# EAGLE board D8035E_pcb_a.v1 (EAGLE 5.07)
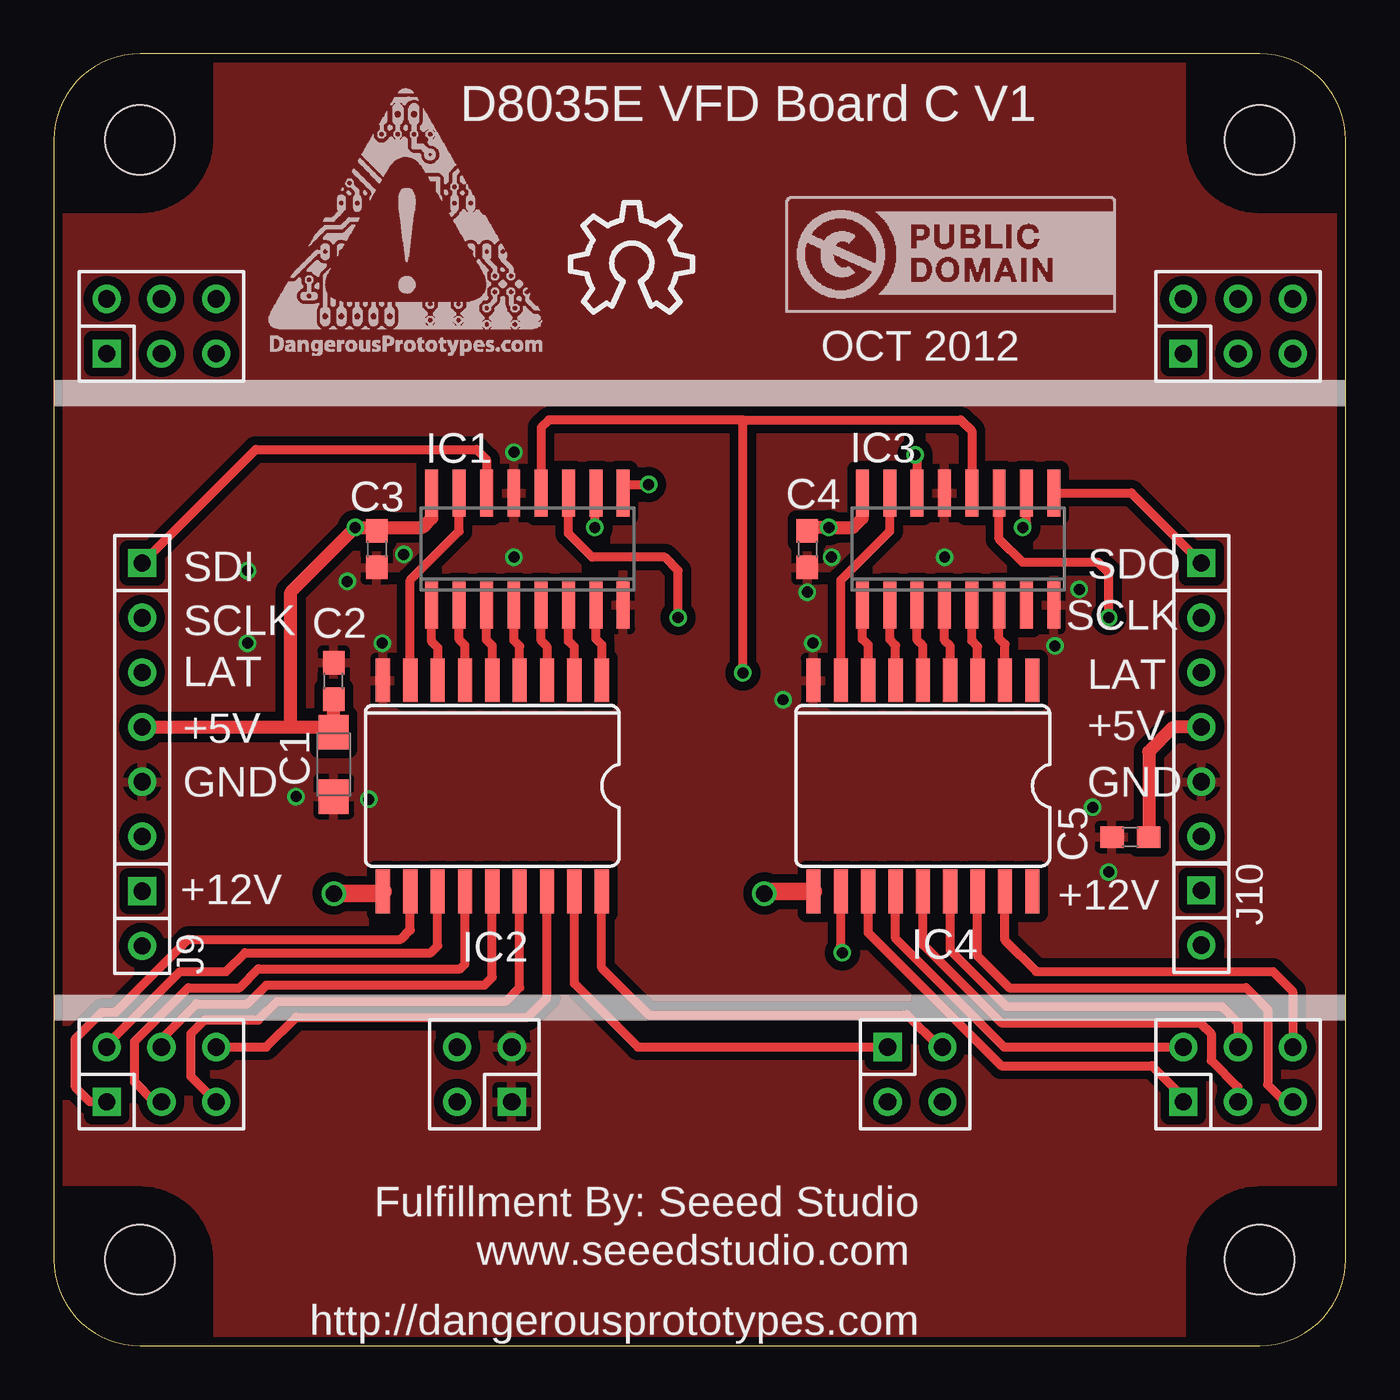
[diagram p0: board, top side]
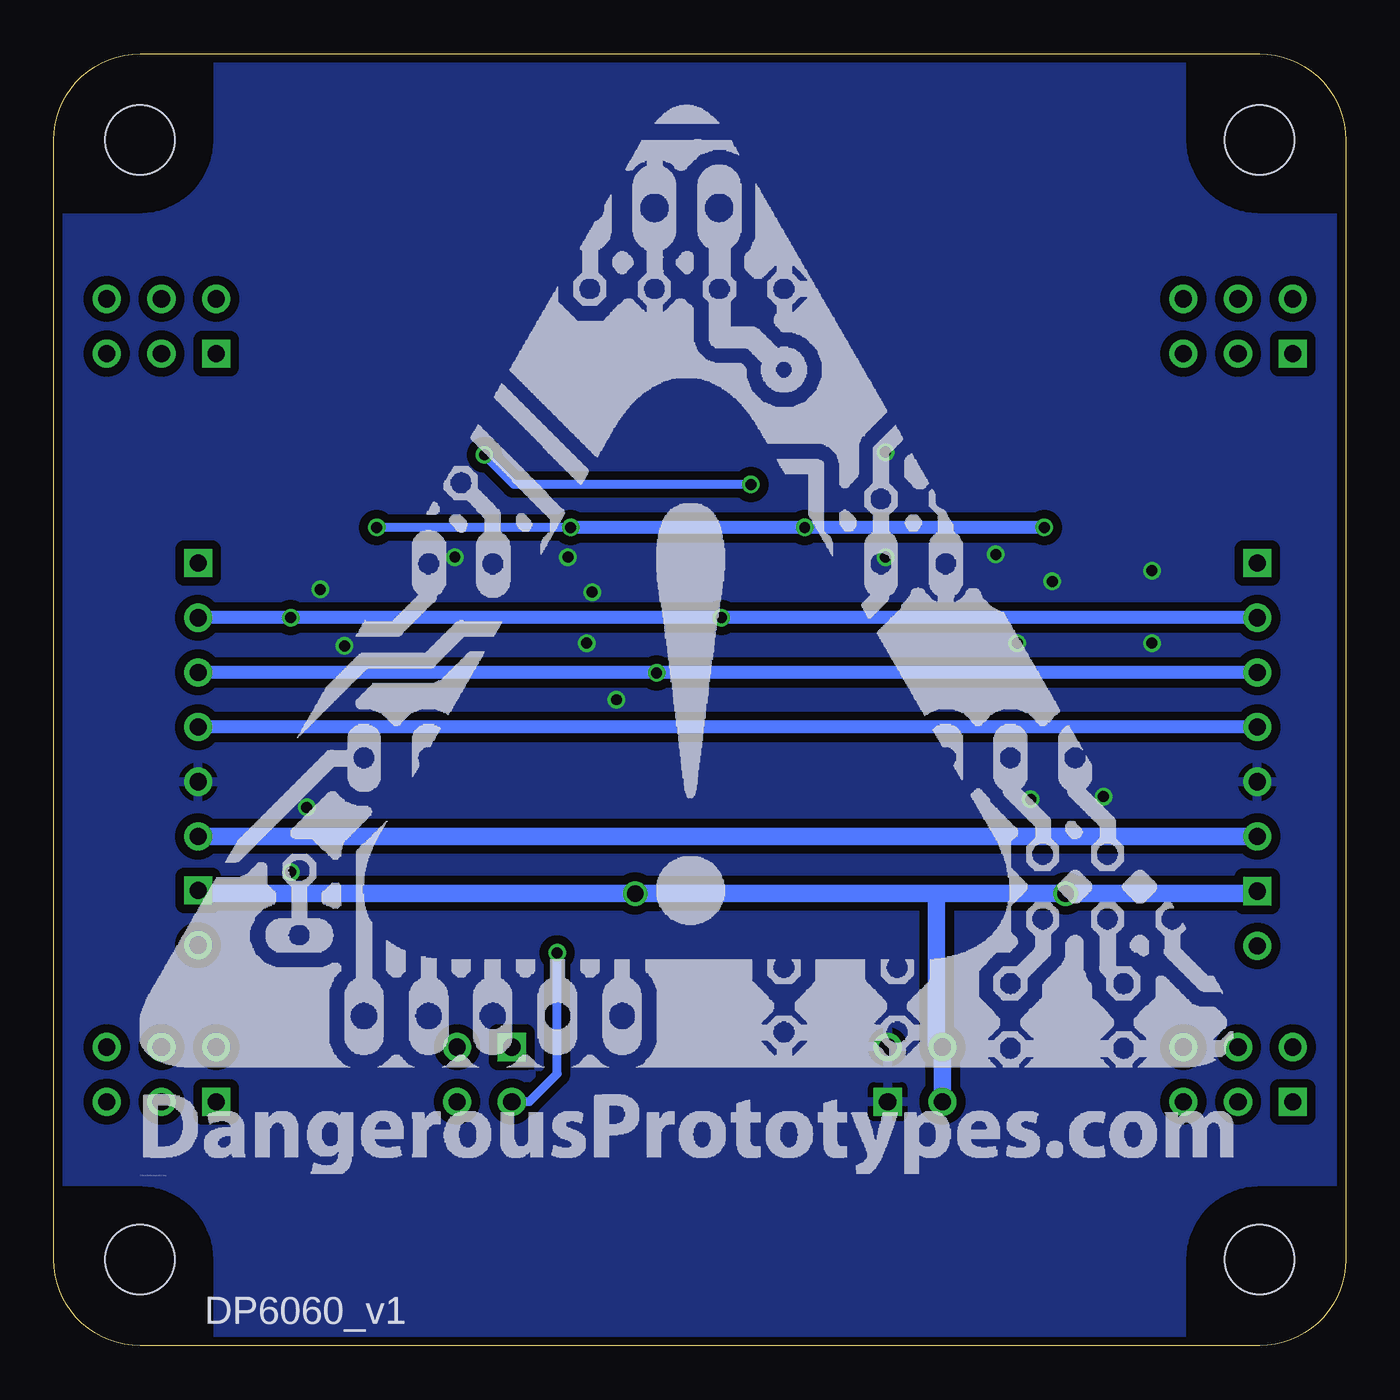
[diagram p1: board, bottom side, seen from below]

Size 60 x 60 mm. Coordinates in mm from the lower left corner, seen from the top.
Copper layers (1*16): Top 0.035mm / dielectric 1.5mm / Bottom 0.035mm
Design rules "Fusion_eagle_rule_v1.1": minimum track width 6mil, minimum drill 12mil, track to track 6mil, track to pad 6mil, pad to pad 6mil, via to via 6mil, smd to smd 0mil, copper to edge 10mil, drill to drill 10mil, minimum pad ring 10mil, minimum via ring 6mil, stop-mask expansion 2mil, vias tented up to drill 100mil, thermal gap 10mil

## Footprints (pad centres in the part's own frame; a part is rotated, then mirrored left to right if it is on the bottom)
SMC_A = smd 1.6 x 1.4: + -1.5,0; - 1.5,0
C603 = smd 1.1 x 1: 1 -0.85,0; 2 0.85,0
SOIC-16 = smd 0.6 x 2.2: 1 -4.445,-2.6; 2 -3.175,-2.6; 3 -1.905,-2.6; 4 -0.635,-2.6; 5 0.635,-2.6; 6 1.905,-2.6; 7 3.175,-2.6; 8 4.445,-2.6; 9 4.445,2.6; 10 3.175,2.6; 11 1.905,2.6; 12 0.635,2.6; 13 -0.635,2.6; 14 -1.905,2.6; 15 -3.175,2.6; 16 -4.445,2.6
SO-18L = smd 0.66 x 2.032: 1 -4.445,-4.902; 2 -3.175,-4.902; 3 -1.905,-4.902; 4 -0.635,-4.902; 5 0.635,-4.902; 6 1.905,-4.902; 7 3.175,-4.902; 8 4.445,-4.902; 9 5.715,-4.902; 10 5.715,4.902; 11 4.445,4.902; 12 3.175,4.902; 13 1.905,4.902; 14 0.635,4.902; 15 -0.635,4.902; 16 -1.905,4.902; 17 -3.175,4.902; 18 -4.445,4.902
M2X3 = drill 0.8 square: 1 -2.54,-1.27 | drill 0.8 round: 2 -2.54,1.27; 3 0,-1.27; 4 0,1.27; 5 2.54,-1.27; 6 2.54,1.27
M2X2 = drill 0.8 square: 1 -1.27,-1.27 | drill 0.8 round: 2 -1.27,1.27; 3 1.27,-1.27; 4 1.27,1.27
M1X6 = drill 0.8 square: 1 0,0 | drill 0.8 round: 2 2.54,0; 3 5.08,0; 4 7.62,0; 5 10.16,0; 6 12.7,0
M1X2 = drill 0.8 square: 1 -1.27,0 | drill 0.8 round: 2 1.27,0
DP6060_V1 = hole 3.2: 4,4; 56,4; 56,56; 4,56

## Placement (x,y rotation side)
C1  10uF 10v  [SMC_A]  13,27 270 top
C2  0.1uF  [C603]  13,30.88 90 top
C3  0.1uF  [C603]  15,37 270 top
C4  0.1uF  [C603]  35,37 270 top
C5  0.1uF  [C603]  50,23.62 180 top
IC1  IC_74HC595-SOIC-16  [SOIC-16]  22,37 0 top
IC2  IC_TD62783-SO-18W  [SO-18L]  21,26 180 top
IC3  IC_74HC595-SOIC-16  [SOIC-16]  42,37 0 top
IC4  IC_TD62783-SO-18W  [SO-18L]  41,26 180 top
J1  CON_HEADER_2X03-PTH  [M2X3]  5,12.6 0 top
J2  CON_HEADER_2X03-PTH  [M2X3]  55,12.6 0 top
J3  CON_HEADER_2X02-PTH  [M2X2]  20,12.6 90 top
J4  CON_HEADER_2X02-PTH  [M2X2]  40,12.6 270 top
J5  CON_HEADER_2X03-PTH  [M2X3]  55,47.35 0 top
J6  CON_HEADER_2X03-PTH  [M2X3]  5,47.35 0 top
J7  CON_HEADER_1X06-PTH  [M1X6]  4.1,36.35 270 top
J8  CON_HEADER_1X06-PTH  [M1X6]  53.3,36.35 270 top
J9  CON_HEADER_1X02-PTH  [M1X2]  4.1,19.84 270 top
J10  CON_HEADER_1X02-PTH  [M1X2]  53.3,19.87 270 top
PCB1  PCB_DP_SQUARE-6X6  [DP6060_V1]  0,0 0 top
U$1  FRAME_DINA4_L  [DP_LOGO]  0.87,-7.06 0 top  (outside the outline)
U$2  [DP_LOGO_ART_2X2]  56,8 0 bottom
U$3  [LOGO_CC-0]  34,48 0 top
U$4  [OSHW_10X200_NOTEXT]  24,48 0 top
U$5  [DP_LOGO_ART_0.5X0.5]  10,46 0 top

## Library data of the parts
C1-C5 IC1-IC4 J1-J10 PCB1 U$2 U$3 U$5 = dp_devices
U$1 = dp_devices; FF1: fulfillment by; FF2: Seeed Studio; FF3: www.seeedstudio.com; LICENSE: CC-0; PROJECT: D8035E VFD Board A V1; URL1: http://DangerousPrototypes.com
U$4 = ohw-logo

## Nets
+5V: C1.+ C2.1 C3.1 C4.1 C5.1 IC1.10 IC1.16 IC3.10 IC3.16 J7.4 J8.4
+12V: IC2.10 IC4.10 J3.2 J3.4 J9.1 J10.1
+180V_PASS: J7.6 J8.6
-: IC1.7 IC2.1
A: IC1.15 IC2.8
B: IC1.1 IC2.7
C: IC1.2 IC2.6
D: IC1.3 IC2.5
DP: IC3.15 IC4.8
E: IC1.4 IC2.4
F: IC1.5 IC2.3
G: IC1.6 IC2.2
G1: IC3.1 IC4.7
G2: IC3.2 IC4.6
G3: IC3.3 IC4.5
G4: IC3.4 IC4.4
G5: IC3.5 IC4.3
G6: IC3.6 IC4.2
GND: C1.- C2.2 C3.2 C4.2 C5.2 IC1.8 IC1.13 IC2.9 IC3.8 IC3.13 IC4.9 J3.1 J3.3 J7.5 J8.5
LATCH: IC1.12 IC3.12 J7.3 J8.3
N$1: IC1.9 IC3.14
N$2: IC3.9 J8.1
OUT_-: IC2.18 J4.2
OUT_A: IC2.11 J1.1
OUT_B: IC2.12 J1.2
OUT_C: IC2.13 J1.3
OUT_D: IC2.14 J1.4
OUT_DP: IC4.11 J4.3
OUT_E: IC2.15 J1.5
OUT_F: IC2.16 J1.6
OUT_G: IC2.17 J4.1
OUT_G1: IC4.12 J2.1
OUT_G2: IC4.13 J2.2
OUT_G3: IC4.14 J2.3
OUT_G4: IC4.15 J2.4
OUT_G5: IC4.16 J2.5
OUT_G6: IC4.17 J2.6
SCLK: IC1.11 IC3.11 J7.2 J8.2
SDA: IC1.14 J7.1

## Tracks (layer width: path | path; a pad name or v marks a point on that pad's centre or on a via)
+5V  (via drill 0.51)
  Top 0.406: 25.12,38.62 25.18,38.67 IC1.10 25.12,39.55 v25.12,38 | IC3.10 45.17,38.17 v45,38
  Top 0.61: C4.1 35,38 v36,38 37.12,38 37.55,38.43 IC3.16 | IC1.16 17.55,38.43 17.12,38 15.15,38 C3.1 14.85,38 v14,38 11,35 11,28.73 | J7.4 11,28.73 | 11,28.73 12.77,28.73 | 12.77,28.73 C1.+ | 12.77,28.73 12.98,28.73 13,28.75 C2.1 | C5.1 50.85,27.58 52,28.73 J8.4
  Bottom 0.406: v36,38 v45,38
  Bottom 0.61: v14,38 v25.12,38 v36,38 | J7.4 J8.4
+12V  (via drill 0.76)
  Top 0.813: IC4.10 33,21.1 v33,21 | v13,21 15.19,21 IC2.10
  Bottom 0.813: J3.2 J3.4 18.87,13.87 19,14 19,21 | J9.1 4,21.11 4,21 v13,21 19,21 | J10.1 53.14,21.14 53,21 v33,21 32,21 19,21
+180V_PASS
  Bottom 0.813: J7.6 J8.6
-
  Top 0.406: IC2.1 25.45,32.55 25.18,32.83 IC1.7
A
  Top 0.406: IC2.8 16.55,35.55 18.82,37.83 IC1.15
B
  Top 0.406: IC2.7 17.82,32.42 17.55,32.7 IC1.1
C
  Top 0.406: IC2.6 19.09,32.53 18.82,32.8 IC1.2
D
  Top 0.406: IC2.5 20.36,32.51 20.09,32.78 IC1.3
DP
  Top 0.406: IC4.8 36.55,35.55 38.83,37.83 IC3.15
E
  Top 0.406: IC2.4 21.64,32.49 21.36,32.76 IC1.4
F
  Top 0.406: IC2.3 22.91,32.47 22.64,32.74 IC1.5
G
  Top 0.406: IC2.2 24.18,32.45 23.91,32.72 IC1.6
G1
  Top 0.406: IC3.1 37.55,32.82 37.83,32.55 IC4.7
G2
  Top 0.406: IC3.2 38.83,32.8 39.09,32.53 IC4.6
G3
  Top 0.406: IC4.5 40.37,32.51 40.09,32.78 IC3.3
G4
  Top 0.406: IC4.4 41.63,32.49 41.37,32.76 IC3.4
G5
  Top 0.406: IC4.3 42.91,32.47 42.63,32.74 IC3.5
G6
  Top 0.406: IC4.2 44.17,32.58 43.91,32.84 IC3.6
GND  (via drill 0.51)
  other vias: 41.38,36.62 21.38,36.62 21.38,41.5 46.5,32.5 13.62,35.5 9,36 9,32.62 15.25,32.62 11.25,25.5 14.62,25.38 49,22 35.25,32.62 33.88,30 47.62,35.12 35,35 36.12,36.62 16.25,36.75 48.25,25
  pour Top (isolate 0.406, rank 6): 0,60 60,60 60,0 0,0
  pour Bottom (isolate 0.406, rank 6): 0,60 60,60 60,0 0,0
LATCH  (via drill 0.51)
  Top 0.406: IC1.12 22.64,42.63 23,43 32,43 | 32,43 42.12,43 42.63,42.49 IC3.12 | v32,31.25 32,43
  Bottom 0.406: J8.3 32.1,31.27 v32,31.25
  Bottom 0.61: J7.3 J8.3
N$1  (via drill 0.51)
  Top 0.406: IC1.9 26.45,39.95 26.5,40 v27.62,40 | IC3.14 40.09,41.28 v40,41.38
  Bottom 0.406: v27.62,40 38.62,40 v40,41.38
N$2
  Top 0.406: IC3.9 50.05,39.6 J8.1
OUT_-
  Top 0.406: J4.2 41.13,13.87 39.62,15.38 27.62,15.38 25.45,17.55 IC2.18
OUT_A
  Top 0.406: IC2.11 16.55,19.3 16.12,18.88 6.25,18.88 2.88,15.5 2.25,15.5 1,14.25 1,12 1.67,11.33 J1.1
OUT_B
  Top 0.406: IC2.12 17.82,18.57 17.5,18.25 8.88,18.25 8,17.38 5.88,17.38 2.46,13.96 J1.2
OUT_C
  Top 0.406: J1.3 4.67,11.33 3.75,12.25 3.75,14.12 6.25,16.62 8.62,16.62 9.5,17.5 18.88,17.5 19.09,17.72 IC2.13
OUT_D
  Top 0.406: IC2.14 20.36,17.11 20,16.75 9.88,16.75 9,15.88 6.62,15.88 5,14.25 J1.4
OUT_DP  (via drill 0.51)
  Top 0.406: IC4.11 36.55,18.32 v36.62,18.25
  Bottom 0.406: J4.3 37.92,11.33 36.62,12.62 v36.62,18.25
OUT_E
  Top 0.406: IC2.15 21.64,16.64 21,16 10.38,16 9.5,15.12 7,15.12 6.38,14.5 6.38,12.49 J1.5
OUT_F
  Top 0.406: IC2.16 22.91,16.16 22,15.25 11.25,15.25 9.87,13.87 J1.6
OUT_G
  Top 0.406: J4.1 27.13,13.87 24.18,16.82 IC2.17
OUT_G1
  Top 0.406: J2.1 52.46,11.54 51,13 44,13 37.83,19.18 IC4.12
OUT_G2
  Top 0.406: J2.2 44.13,13.87 39.09,18.91 IC4.13
OUT_G3
  Top 0.406: J2.3 55,12 53.75,13.25 53.75,14.5 53.25,15 44,15 40.37,18.64 IC4.14
OUT_G4
  Top 0.406: J2.4 55,15 54.25,15.75 44.25,15.75 41.63,18.36 IC4.15
OUT_G5
  Top 0.406: J2.5 57.17,11.33 56.38,12.12 56.38,15.62 55.38,16.62 44.38,16.62 42.91,18.09 IC4.16
OUT_G6
  Top 0.406: J2.6 57.54,16.46 56.62,17.38 45.62,17.38 44.17,18.82 IC4.17
SCLK  (via drill 0.51)
  Top 0.406: IC1.11 23.91,37.72 25,36.62 28.38,36.62 29,36 v29,33.81 | IC3.11 43.91,37.47 45,36.38 48.5,36.38 49,35.88 49,35.12 49,35 v49,33.81
  Bottom 0.61: J7.2 v29,33.81 v49,33.81 J8.2
SDA
  Top 0.406: IC1.14 20.09,41.16 19.62,41.62 9.38,41.62 J7.1

## Text on the board
tPlace: D8035E VFD Board C V1 | OCT 2012 | SDI | SDO | SCLK | SCLK | LAT | LAT | +5V | +5V | GND | GND | +12V | +12V | Fulfillment By: Seeed Studio | www.seeedstudio.com | http://dangerousprototypes.com